# Altium PCB MTCH9010_Evaluation_Kit.PcbDoc (part 1 of 2)
Units mm, origin at the board's own origin, x right, y up, seen from the top; angles counter-clockwise.
Board outline 60 x 70 mm, 4 copper layers (Top Layer, Gnd Plane 1, Gnd Plane 2, Bottom Layer), stack 1.574 mm thick; 87 components, 67 nets, 337 pads, 182 vias.
Unrouted connection lines stored in the file: 1.
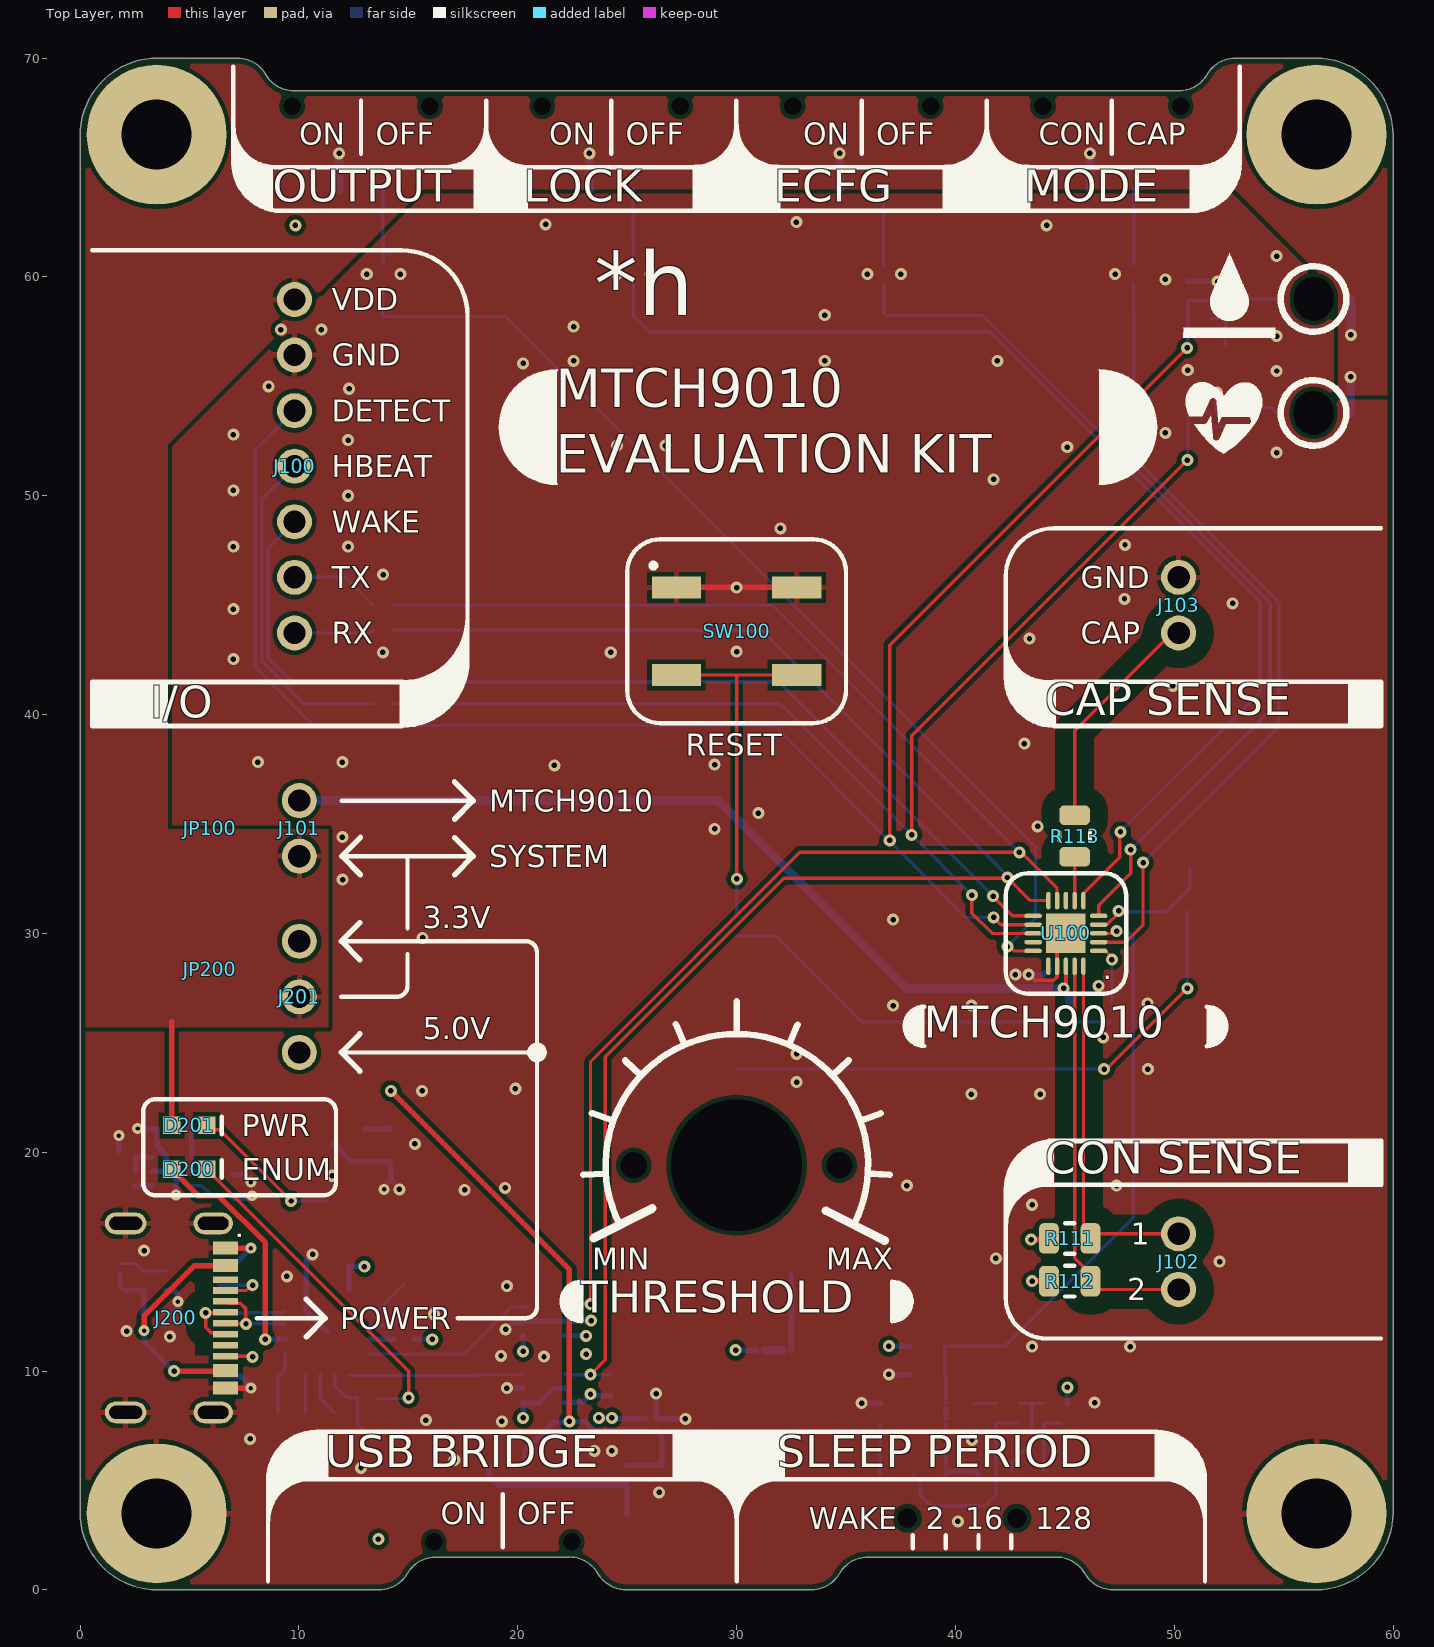
[diagram p0: Top Layer view]
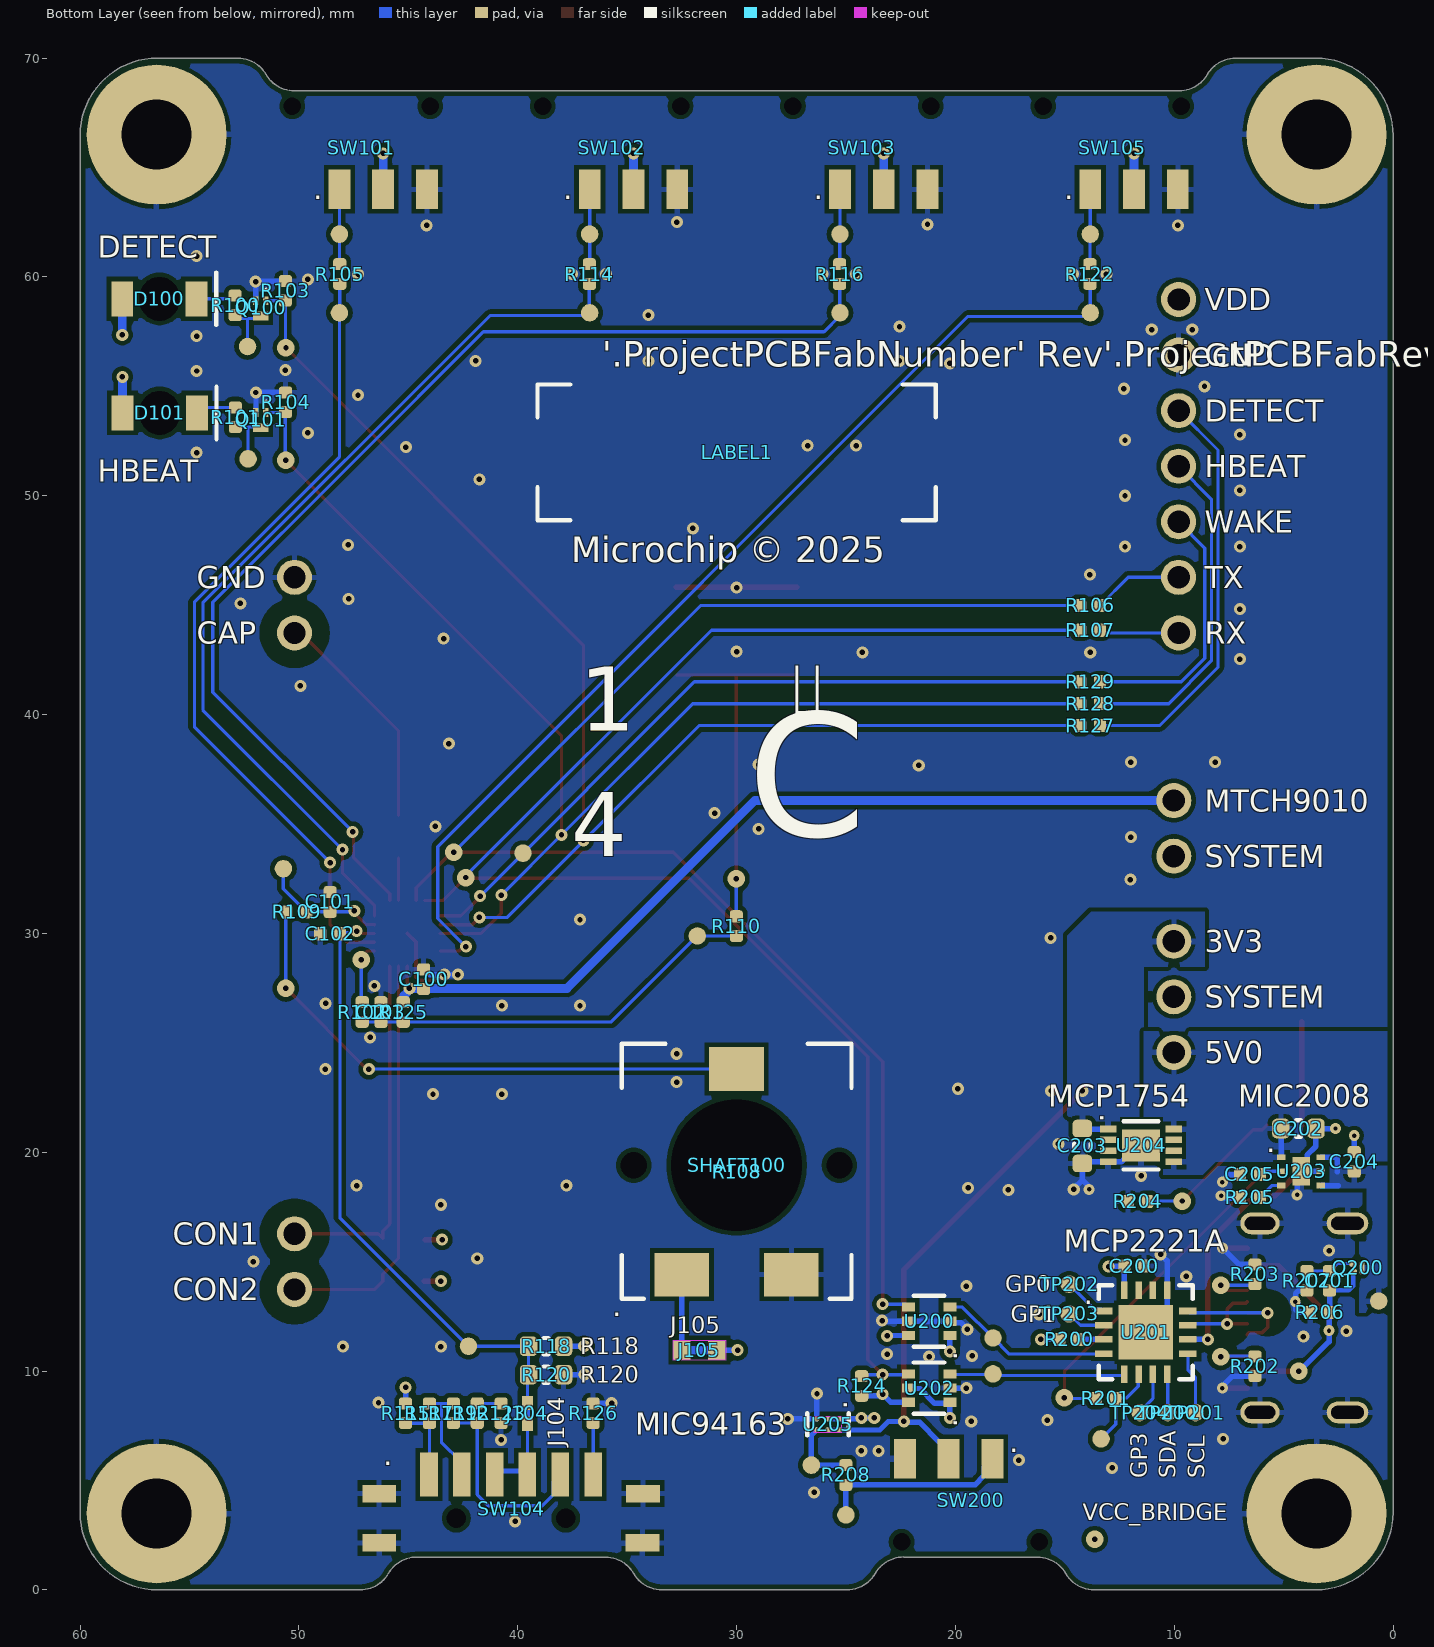
[diagram p1: Bottom Layer view, seen from below]
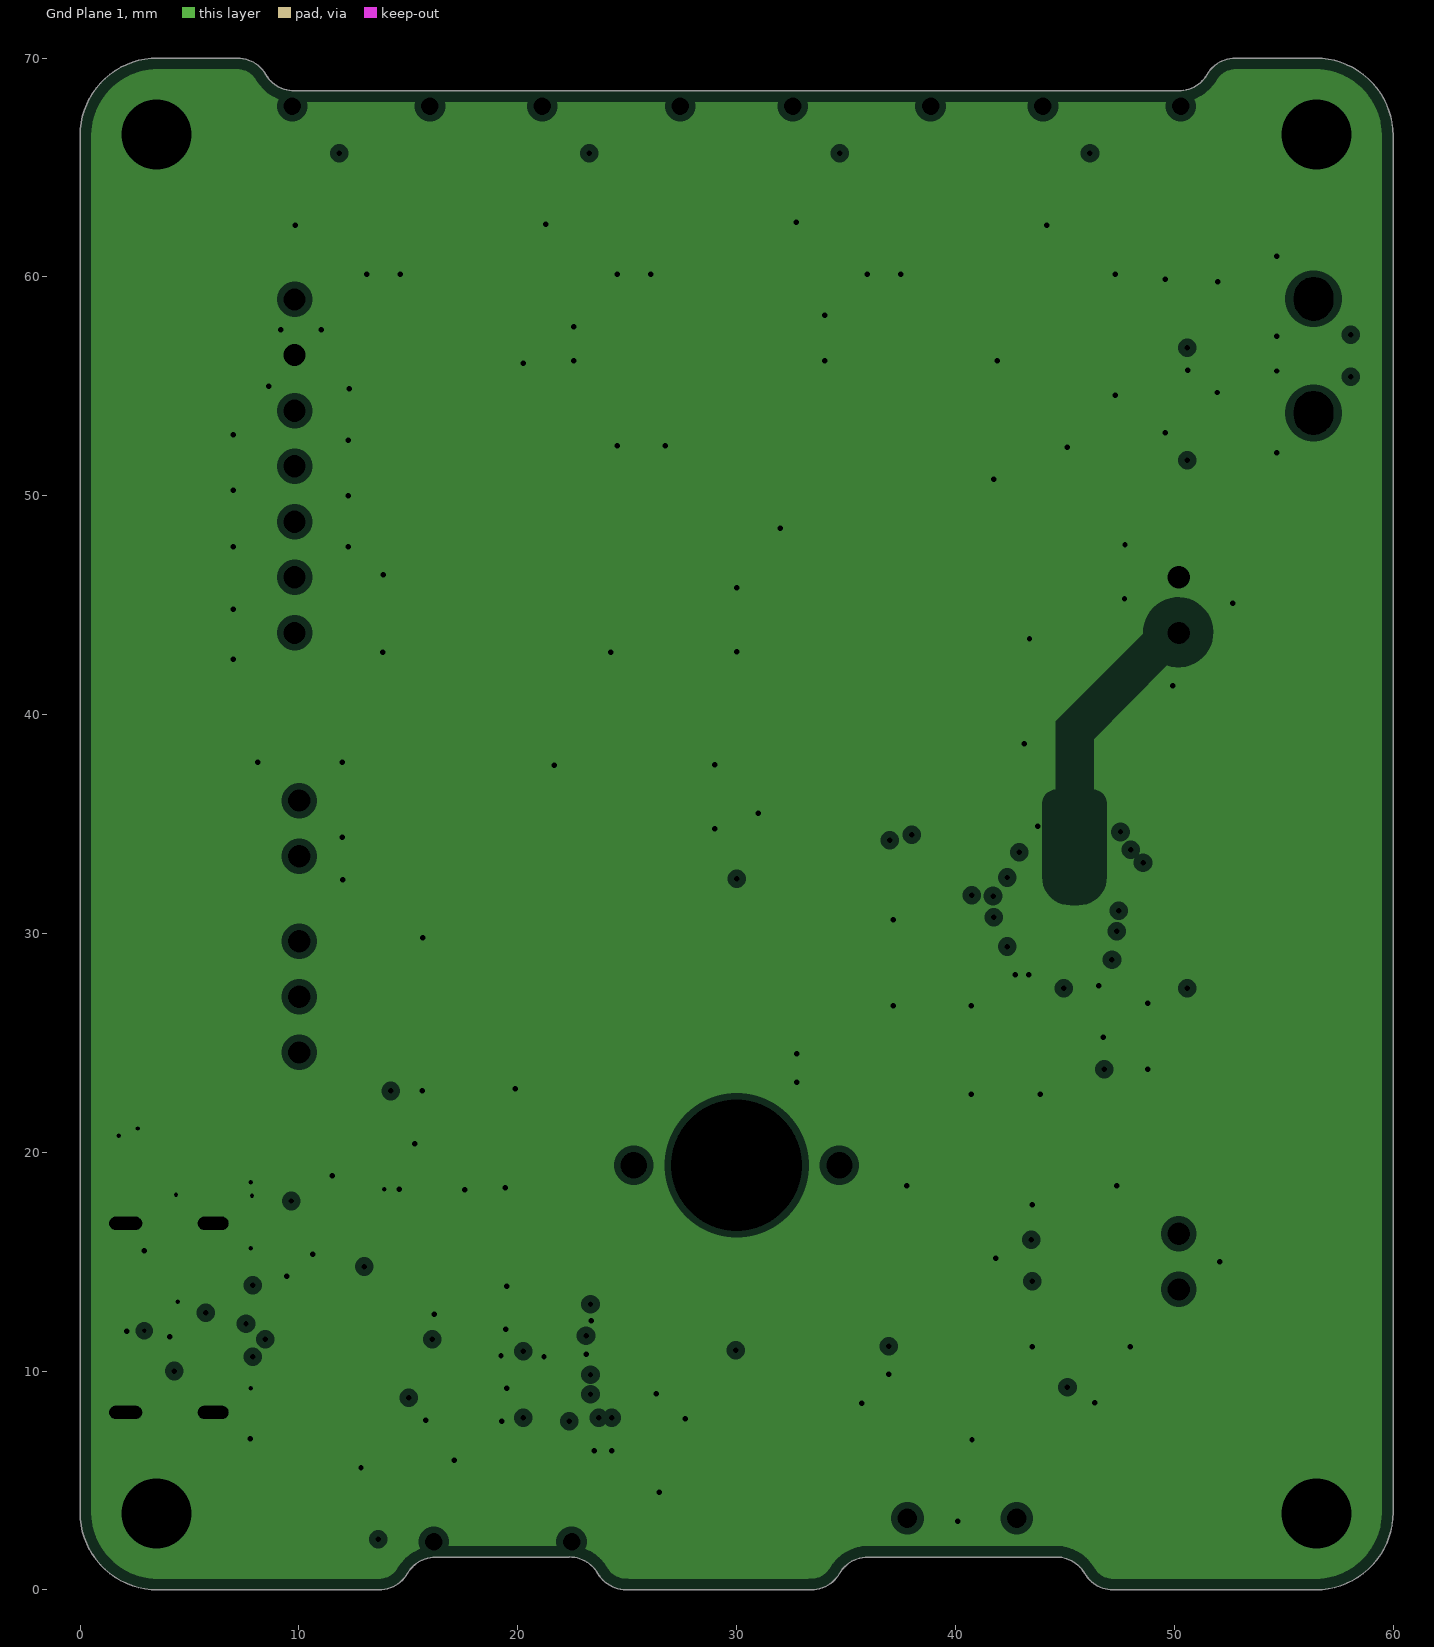
[diagram p2: Gnd Plane 1, clearances drawn from the general rule]
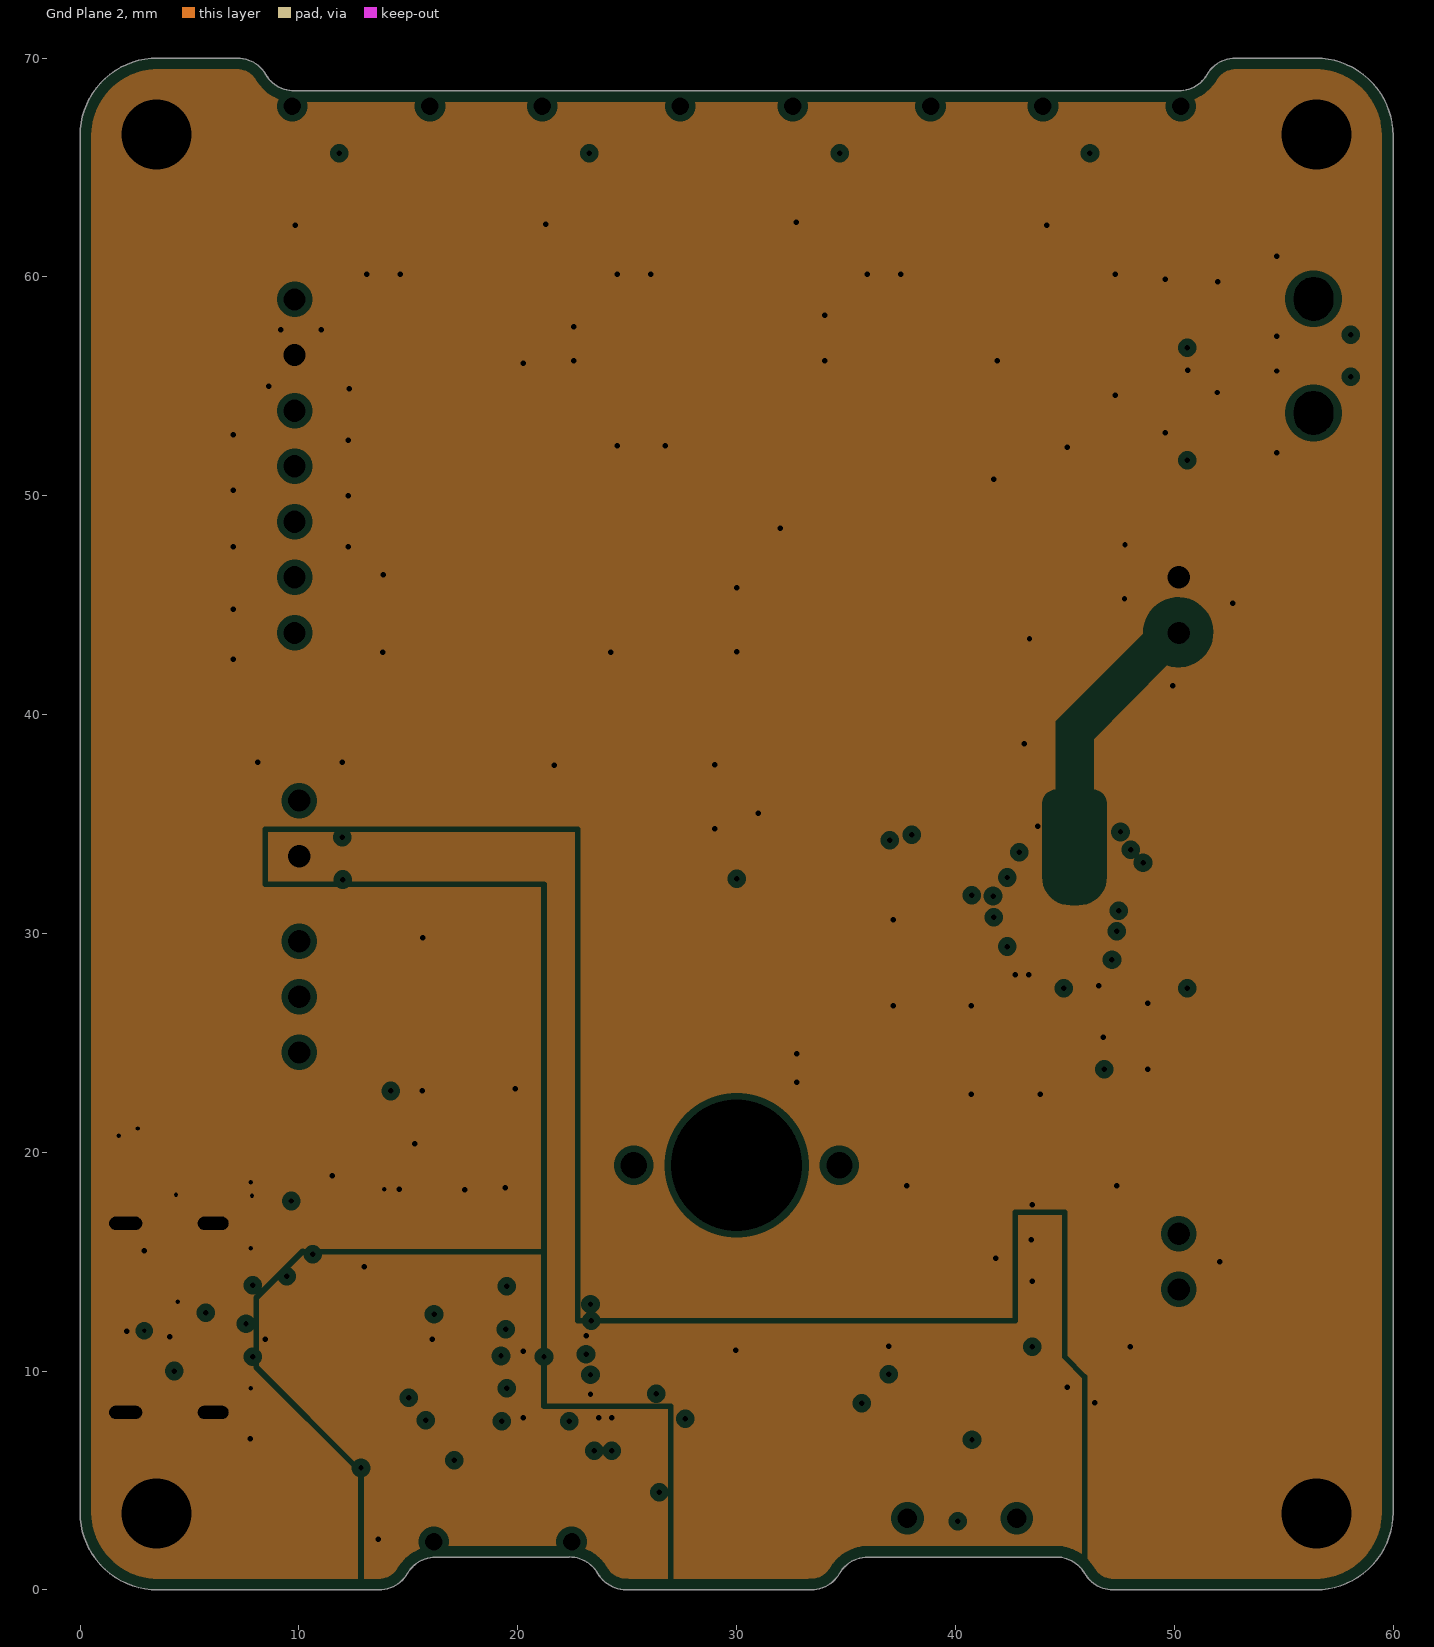
[diagram p3: Gnd Plane 2, clearances drawn from the general rule]

## Layer stack, top to bottom
Top Solder: solder mask 0.01, Solder Resist, Dk 3.5
Top Layer: signal copper 0.035
Dielectric 1: prepreg 0.1168, PP-016, Dk 4.4
Gnd Plane 1: plane copper 0.035, net GND
Dielectric2: core 1.2, FR-4, Dk 4.2
Gnd Plane 2: plane copper 0.035, net (Multiple Nets)
Dielectric 3: prepreg 0.1168, PP-016, Dk 4.4
Bottom Layer: signal copper 0.035
Bottom Solder: solder mask 0.01, Solder Resist, Dk 3.5

## Board outline
3.54,0 13.66,-0.001 13.66,0 ccw(c13.66,1.5) 14.959,0.75 cw(c16.258,0) 16.258,1.5 16.246,1.5 22.358,1.5 22.36,1.504 cw(c22.36,0.004) 23.659,0.754 ccw(c24.958,1.504) 24.958,0.004 24.956,0 33.4,0 33.406,0 ccw(c33.406,1.5) 34.705,0.75 cw(c36.004,0) 36.004,1.5 36.006,1.5 44.608,1.5 44.609,1.5 cw(c44.609,0) 45.908,0.75 ccw(c47.207,1.5) 47.207,0 56.46,0 ccw(c56.46,3.54) 60,3.54 60,66.46 ccw(c56.46,66.46) 56.46,70 52.799,70 ccw(c52.799,68.5) 51.5,69.25 cw(c50.201,70) 50.201,68.5 50.2,68.5 9.787,68.5 9.786,68.5 cw(c9.786,70) 8.487,69.25 ccw(c7.188,68.5) 7.188,70 3.54,70 ccw(c3.54,66.46) 0,66.46 0,66.51 0,3.54 ccw(c3.54,3.54)

## Design rules (kind name [scope] priority, off if disabled: settings)
AcuteAngle [All] p1: minimum=7.50000000000000E+0001 checktracksonly=FALSE
AssemblyTestPointUsage AssemblyTestPointUsage_Prohibited [InNetClass('NO TESTPOINT')] p1: valid=1
AssemblyTestPointUsage [All] p2: allowmultiple=TRUE
AssemblyTestpoint AssemblyTestpoint_TP_Component [HasFootprint('CON_TP_0.8dia_SMD_with_Test_Jig_Layer') Or HasFootprint('CON_JMPR_0603_PCB_TRACE_LINK_N')] p1: testpointundercomponent=TRUE minsize=0.8 maxsize=2.54 preferedsize=0.8 minholesize=0 maxholesize=1.27 preferedholesize=0.25 testpointgrid=0.025 usegrid=FALSE gridtolerance=0 allowsidetop=TRUE allowsidebottom=TRUE minspacing=1.27
AssemblyTestpoint [All] p2: testpointundercomponent=FALSE minsize=0.8 maxsize=2.54 preferedsize=0.8 minholesize=0 maxholesize=1.27 preferedholesize=0.25 testpointgrid=0.025 usegrid=FALSE gridtolerance=0 allowsidebottom=TRUE minspacing=1.27 compbodyclearance=1.27
BoardOutlineClearance BoardOutlineClearance_LAYERNAME [IsText and (X1 >= 100) and (Y1 <= -60)] p1: gap=0 ignorepadtopadclearanceinfootprint=FALSE
BoardOutlineClearance [All] p2: gap=0.25 ignorepadtopadclearanceinfootprint=FALSE
Clearance Clearance_Small_FET [HasFootprint('LGA-3_GSD_0.7x0.6_CSD25501F3')] p1: gap=0.15 ignorepadtopadclearanceinfootprint=FALSE except(0.1: SMDPad-SMDPad; 0.3: Arc-Hole Track-Hole SMDPad-Hole THPad-Hole Via-Hole Fill-Hole Poly-Hole Region-Hole Text-Hole)
Clearance Clearance_Poly_Impedance [IsRegion AND InNet('GND') vs InDifferentialPairClass('All Differential Pairs') OR InNetClass('SENSE')] p2: gap=0.8 ignorepadtopadclearanceinfootprint=FALSE
Clearance Clearance_Poly [InPoly] p3: gap=0.2 ignorepadtopadclearanceinfootprint=FALSE
Clearance [All] p4: gap=0.15 ignorepadtopadclearanceinfootprint=FALSE except(0.3: Arc-Hole Track-Hole SMDPad-Hole THPad-Hole Via-Hole Fill-Hole Poly-Hole Region-Hole Text-Hole)
ComponentClearance ComponentClearance_Jumper [HasFootprint('Jumper_Mechanical')] p1: gap=0 collisioncheckmode=3 verticalgap=0 showdistances=FALSE
ComponentClearance [All] p2: gap=0.254 collisioncheckmode=3 verticalgap=0.254 showdistances=TRUE donotcheckwithout3dbody=TRUE
DiffPairsRouting [All] p1: maxlimit=0.22 minlimit=0.22 mostfreqgap=0.22 toplayer_minwidth=0.16 toplayer_maxwidth=0.16 toplayer_prefwidth=0.16 bottomlayer_minwidth=0.16 bottomlayer_maxwidth=0.16 bottomlayer_prefwidth=0.16 maxuncoupledlength=7
FabricationTestPointUsage TestPointUsage [All] p1 off: valid=2 allowmultiple=TRUE
FabricationTestpoint Testpoint [All] p1 off: side=2 testpointundercomponent=TRUE minsize=0.8 maxsize=2.54 preferedsize=0.8 minholesize=0 maxholesize=1.27 preferedholesize=0.25 testpointgrid=0 allowsidebottom=TRUE usegrid=FALSE gridtolerance=0 minspacing=1.27
HoleSize [All] p1: absolutevalues=TRUE maxlimit=6.2 minlimit=0.2 maxpercent=80.000 minpercent=20.000
HoleToHoleClearance [All] p1: gap=0.3 allowstackedmicrovias=FALSE
MinimumAnnularRing [All] p1: minimumring=0.15
MinimumSolderMaskSliver LevelShifters [HasCompParameterValue('MCHP-ID','IC1665')] p1: minsoldermaskwidth=0.075
MinimumSolderMaskSliver [All] p2: minsoldermaskwidth=0.08
NetAntennae [Not IsTestpoint] p1: netantennaetolerance=0
PlaneClearance [All] p1: clearance=0.3
PlaneConnect [All] p1: pad.planeconnectstyle=Relief pad.reliefexpansion=0.25 pad.reliefentries=4 pad.reliefconductorwidth=0.25 pad.reliefairgap=0.25 via.planeconnectstyle=Direct via.reliefexpansion=0.508 via.reliefentries=4 via.reliefconductorwidth=0.254 via.reliefairgap=0.254
PolygonConnect [All] p1: thpad.connectstyle=Relief thpad.reliefconductorwidth=0.254 thpad.reliefentries=4 thpad.polygonreliefangle="90 Angle" thpad.airgapwidth=0.2 smdpad.connectstyle=Relief smdpad.reliefconductorwidth=0.254 smdpad.reliefentries=4 smdpad.polygonreliefangle="90 Angle" smdpad.airgapwidth=0.2 via.connectstyle=Direct via.reliefconductorwidth=0.254 via.reliefentries=4 via.polygonreliefangle="90 Angle" via.airgapwidth=0.2
RoutingVias [All] p1: holewidth=0.25 width=0.55 viastyle="Through Hole" minholewidth=0.2 minwidth=0.5 maxholewidth=0.5 maxwidth=1
SMDNeckDown [All] p1: percent=98.000
SilkToSilkClearance SilkToSilkClearance_Text [IsText] p1: silktosilkclearance=0
SilkToSilkClearance [All] p2: silktosilkclearance=0.1
SilkToSolderMaskClearance SilkscreenOverComponentPads_Soldermask [All] p1: minsilkscreentomaskgap=0.12 clearancetoexposedcopper=FALSE
SilkToSolderMaskClearance SilkscreenOverComponentPads_Copper [All] p2: minsilkscreentomaskgap=0.2 clearancetoexposedcopper=TRUE
SolderMaskExpansion SolderMaskTenting [IsVia AND NOT (IsFabTestpoint OR IsAssyTestpoint)] p1: expansion=-1 istentingtop=FALSE
SolderMaskExpansion [All] p2: expansion=0.06 istentingtop=FALSE
SupplyNets "Schematic Supply Nets_1" [InNet('VCC_BRIDGE')] p1: voltage=0.000
SupplyNets "Schematic Supply Nets_12" [InNet('VCC_P5V0')] p2: voltage=0.000
SupplyNets "Schematic Supply Nets_11" [InNet('VCC_MTCH9010')] p3: voltage=0.000
SupplyNets "Schematic Supply Nets_10" [InNet('VCC_SYSTEM')] p4: voltage=0.000
SupplyNets "Schematic Supply Nets_8" [InNet('VBUS')] p5: voltage=0.000
SupplyNets "Schematic Supply Nets_6" [InNet('GND')] p6: voltage=0.000
SupplyNets "Schematic Supply Nets_4" [InNet('VCC_P3V3')] p7: voltage=0.000
SupplyNets "Schematic Supply Nets" [InNet('VBUS_DELAYED')] p8: voltage=0.000
UnRoutedNet [All] p1: checkbadconnections=TRUE
ViasUnderSMD ViasUnderSMD_Testpoint [HasPad('TP202-1') OR HasPad('U200-7')] p1: allowed=TRUE
ViasUnderSMD [All] p2: allowed=FALSE
Width Power_Width [(InNet('VCC_MTCH9010') AND InNet('VBUS_DELAYED') AND InNet('VBUS') AND InNet('VCC_P3V3') AND InNet('VCC_P5V0') AND InNet('VCC_SYSTEM'))] p1: maxlimit=0.254 minlimit=0.2 preferedwidth=0.25 minimp=50.000000 maximp=50.000000 favimp=50.000000
Width [All] p2: maxlimit=10 minlimit=0.125 preferedwidth=0.15 minimp=50.000000 maximp=50.000000 favimp=50.000000
15 further rules are at their usual default settings.

## Classes and differential pairs
net class "NO TESTPOINT": CAP_INPUT NetC201_1 NetC205_2 NetJ104_2 NetR121_1 NetR126_1 NetR200_1 NetR205_2 SENSE_CAP SENSE_CON1 SENSE_CON2 SLEEP_2S SLEEP_16S SLEEP_128S USB_N USB_P
net class SENSE: CAP_INPUT SENSE_CAP SENSE_CON1 SENSE_CON2
component class MTCH9010_Evaluation_Kit_TopLevel: LABEL1 Test1
component class S2: C100 C101 C102 C103 D100 D101 J100 J101 J102 J103 J104 J105 JP100 mx Q100 Q101 R100 R101 R102 R103 R104 R105 R106 R107 R108 R109 R110 R111 R112 R113 R114 R115 R116 R117 R118 R119 R120 R121 R122 R123 R124 R125 R126 R127 R128 R129 SHAFT100 SW100 SW101 SW102 SW103 SW104 SW105 U100
component class S1: C200 C201 C202 C203 C204 C205 D200 D201 J200 J201 JP200 Q200 R200 R201 R202 R203 R204 R205 R206 R207 R208 SW200 TP200 TP201 TP202 TP203 TP204 U200 U201 U202 U203 U204 U205
differential pair USB: +USB_P -USB_N

## Components (designator, comment, footprint, x,y, rotation, side; value= is the part's Value field where it differs from the comment)
C100 "Capacitor NP" CAP_C_0402 44.3,27.91 r90 bottom locked value=0.1uF
C101 "Capacitor NP" CAP_C_0402 48.575,31.435 r270 bottom locked value=1000pF
C102 "Capacitor NP" CAP_C_0402 48.575,29.985 r180 bottom locked value=1000pF
C103 "Capacitor NP" CAP_C_0402 46.25,26.405 r90 bottom locked value=10nF
C200 "Capacitor NP" CAP_C_0402 11.825,14.795 r180 bottom locked value=0.1uF
C201 "Capacitor NP" CAP_C_0402 2.9,14.125 r270 bottom locked value=0.1uF
C202 "Capacitor NP" CAP_C_0603 4.326,21.082 r0 bottom locked value=4.7uF
C203 "Capacitor NP" CAP_C_0603 14.2,20.286 r90 bottom locked value=4.7uF
C204 "Capacitor NP" CAP_C_0402 1.773,19.559 r270 bottom locked value=2.2uF
C205 "Capacitor NP" CAP_C_0402 6.54,18.982 r180 bottom locked value=2200pF
D100 "LED_yellow" LED_DIA_597-6xxx_1206_RM 56.373,59 r180 top locked value=YELLOW
D101 "LED_yellow" LED_DIA_597-6xxx_1206_RM 56.366,53.788 r180 top locked value=YELLOW
D200 "LED_green" LED_0603_Green 4.978,19.226 r0 top locked value=GREEN
D201 "LED_green" LED_0603_Green 4.978,21.226 r0 top locked value=GREEN
J100 "Header 1x7" HDR_F_2.54_1x7_TH-PIP_RA_WCON_2185-107RSNCYNR1 9.8,51.35 r90 top locked value="HDR-2.54 Female 1x7"
J101 "Header 1x2" HDR_M_2.54_1X2_U_TH-PIP_RA_WCON_1125-1102S0R140CR01 7.247,34.8 r270 top locked value="HDR-2.54 Male 1x2"
J102 "Header 1x2" HDR_F_2.54_1x2_TH-PIP_RA_WCON_2185-102RSNCYNR1 50.2,15 r270 top locked value="HDR-2.54 Female 1x2"
J103 "Header 1x2" HDR_F_2.54_1x2_TH-PIP_RA_WCON_2185-102RSNCYNR1 50.2,45 r270 top locked value="HDR-2.54 Female 1x2"
J104 "CON JMPR LINK CLOSED" CON_JMPR_0402_PCB_TRACE_LINK 39.558,8.071 r270 bottom locked net-tie value="CON 0402 PCB TRACE LINK"
J105 "CON JMPR LINK CLOSED" CON_JMPR_0603_PCB_TRACE_LINK_N 31.7,10.954 r180 bottom locked net-tie value="CON 0603 PCB TRACE LINK"
J200 "CON USB2.0-C RCPT SMD RA KLS KLS1-5409" CON_USB2.0-C_RCPT_SMD_RA_KLS_KLS1-5409 3.437,12.43 r270 top locked value="USB2.0 Type-C FEMALE"
J201 "Header 1x3" HDR_M_2.54_1X2_U_TH-PIP_RA_WCON_1125-1103S0R140CR01 7.247,27.1 r270 top locked value="HDR-2.54 Male 1x3"
JP100 "Jumper Mechanical" Jumper_Mechanical 5.924,34.8 r90 top value="JUMPER 2.54mm 1x2"
JP200 "Jumper Mechanical" Jumper_Mechanical 5.924,28.353 r90 top value="JUMPER 2.54mm 1x2"
LABEL1 "08-10015" 08-10015 30,51.985 r180 bottom locked value="PCBA LABEL 18X6mm"
Q100 "Transistor MOS-N GSD" X1-DFN1006-3 51.746,58.567 r270 bottom locked value=DMN65D8LFB-7B
Q101 "Transistor MOS-N GSD" X1-DFN1006-3 51.739,53.454 r270 bottom locked value=DMN65D8LFB-7B
Q200 "Transistor MOS-P GSD" LGA-3_GSD_0.7x0.6_CSD25501F3 1.646,14.712 r180 bottom locked value=CSD25501F3
R100 "Resistor" RES_C_0402 52.913,58.7 r90 bottom locked value=2.2k
R101 "Resistor" RES_C_0402 52.906,53.588 r90 bottom locked value=2.2k
R102 "Resistor" RES_C_0402 47.106,26.405 r270 bottom locked value=470R
R103 "Resistor" RES_C_0402 50.618,59.367 r270 bottom locked value=300k
R104 "Resistor" RES_C_0402 50.611,54.272 r270 bottom locked value=300k
R105 "Resistor" RES_C_0402 48.135,60.132 r90 bottom locked value=1k
R106 "Resistor" RES_C_0402 13.842,44.985 r0 bottom locked value=1k
R107 "Resistor" RES_C_0402 13.842,43.854 r0 bottom locked value=1k
R108 "Resistor Var" RES_VAR_PIHER_PS-10V60_L10.9W10.3H5.7 30,19.403 r180 bottom locked value=100k
R109 "Resistor" RES_C_0402 50.11,30.985 r0 bottom locked value=1k
R110 "Resistor" RES_C_0402 30.01,30.333 r90 bottom locked value=470R
R111 "Resistor" RES_C_0805 45.225,16.061 r180 top locked value=10k
R112 "Resistor" RES_C_0805 45.225,14.107 r180 top locked value=10k
R113 "Resistor" RES_C_0805 45.45,34.45 r90 top locked value=10k
R114 "Resistor" RES_C_0402 36.727,60.132 r90 bottom locked value=1k
R115 "Resistor" RES_C_0402 45.129,8.071 r90 bottom locked value=100k
R116 "Resistor" RES_C_0402 25.29,60.132 r90 bottom locked value=1k
R117 "Resistor" RES_C_0402 44.036,8.071 r90 bottom locked value=300k
R118 "Resistor" RES_C_0603 38.708,11.134 r180 bottom locked value=0R
R119 "Resistor" RES_C_0402 42.943,8.071 r270 bottom locked value=300k
R120 "Resistor" RES_C_0603 38.708,9.834 r0 bottom locked value=0R
R121 "Resistor" RES_C_0402 41.85,8.074 r270 bottom locked value=100k
R122 "Resistor" RES_C_0402 13.852,60.132 r90 bottom locked value=1k
R123 "Resistor" RES_C_0402 40.758,8.071 r90 bottom locked value=100k
R124 "Resistor" RES_C_0402 24.282,9.32 r270 bottom locked value=47k
R125 "Resistor" RES_C_0402 45.231,26.405 r90 bottom locked value=10k
R126 "Resistor" RES_C_0402 36.556,8.071 r90 bottom locked value=1k
R127 "Resistor" RES_C_0402 13.841,39.5 r0 bottom locked value=1k
R128 "Resistor" RES_C_0402 13.842,40.5 r0 bottom locked value=1k
R129 "Resistor" RES_C_0402 13.842,41.5 r0 bottom locked value=1k
R200 "Resistor" RES_C_0402 14.8,11.445 r0 bottom locked value=1k
R201 "Resistor" RES_C_0402 13.125,8.75 r180 bottom locked value=1k
R202 "Resistor" RES_C_0402 6.311,10.22 r270 bottom locked value=5.1k
R203 "Resistor" RES_C_0402 6.311,14.42 r90 bottom locked value=5.1k
R204 "Resistor" RES_C_0402 11.667,17.75 r180 bottom locked value=1k
R205 "Resistor" RES_C_0402 6.54,17.933 r180 bottom locked value=470R
R206 "Resistor" RES_C_0402 3.35,12.683 r0 bottom locked value=47k
R207 "Resistor" RES_C_0402 3.937,14.125 r270 bottom locked value=47k
R208 "Resistor" RES_C_0402 25.004,5.25 r90 bottom locked value=47k
SHAFT100 "PT10_SHAFT" PT10_Shaft_Mechanical 30,19.403 r180 bottom locked value="MISC PT10-SHAFT"
SW100 "Switch 4 Pin" SW_TACT_SMD_DW_TS604VM1-035CR-R 30,43.809 r0 top locked value="TACT SPST"
SW101 "SWITCH SLIDE SMD SPDT SLW-88229-2-SMT-TR" SW_SLIDE_SMD_SS_SLW-88229-2-SMT-TR 47.15,66.25 r180 bottom locked value="SLIDE SPDT"
SW102 "SWITCH SLIDE SMD SPDT SLW-88229-2-SMT-TR" SW_SLIDE_SMD_SS_SLW-88229-2-SMT-TR 35.712,66.25 r180 bottom locked value="SLIDE SPDT"
SW103 "SWITCH SLIDE SMD SPDT SLW-88229-2-SMT-TR" SW_SLIDE_SMD_SS_SLW-88229-2-SMT-TR 24.275,66.25 r180 bottom locked value="SLIDE SPDT"
SW104 "SWITCH SLIDE SMD SP4T" SW_SLIDE_SMD_RA_SP4T_L-KLS7-MSS-1400SD-BR 40.306,3.276 r0 bottom locked value="SLIDE SP4T"
SW105 "SWITCH SLIDE SMD SPDT SLW-88229-2-SMT-TR" SW_SLIDE_SMD_SS_SLW-88229-2-SMT-TR 12.837,66.25 r180 bottom locked value="SLIDE SPDT"
SW200 "SWITCH SLIDE SMD SPDT SLW-88229-2-SMT-TR" SW_SLIDE_SMD_SS_SLW-88229-2-SMT-TR 19.309,3.743 r0 bottom locked value="SLIDE SPDT"
TP200 "Test Point No BOM" CON_TP_0.8dia_SMD_with_Test_Jig_Layer 10.3,8.1 r90 bottom locked value="TP SMD D0.8"
TP201 "Test Point No BOM" CON_TP_0.8dia_SMD_with_Test_Jig_Layer 9.03,8.1 r90 bottom locked value="TP SMD D0.8"
TP202 "Test Point No BOM" CON_TP_0.8dia_SMD_with_Test_Jig_Layer 14.8,13.97 r90 bottom locked value="TP SMD D0.8"
TP203 "Test Point No BOM" CON_TP_0.8dia_SMD_with_Test_Jig_Layer 14.8,12.612 r90 bottom locked value="TP SMD D0.8"
TP204 "Test Point No BOM" CON_TP_0.8dia_SMD_with_Test_Jig_Layer 11.57,8.1 r90 bottom locked value="TP SMD D0.8"
U100 "MTCH9010-VQFN20" VQFN-20_3X3_EP1.8x1.8_NO_VIAS 45.05,30 r180 top locked value=MTCH9010
U200 "74LVC(H)1T45 SOT-23-6_SC-70-6_SOT-6_SOT-363_DSBGA" SOT-363 21.2,12.275 r0 bottom locked value=74LVC1T45DW-7
U201 "MCP2221 QFN-16" QFN-16_4X4_EP2.5X2.5 11.3,11.77 r180 bottom locked value=MCP2221A
U202 "74LVC(H)1T45 SOT-23-6_SC-70-6_SOT-6_SOT-363_DSBGA" SOT-363 21.2,9.22 r0 bottom locked value=74LVC1T45DW-7
U203 "MIC2008YML-TR VDFN-6" VDFN-6_2x2_EP0.8X1.40 4.204,19.126 r180 bottom locked value=MIC2008
U204 "MCP1755 DFN-8" DFN-8_2x3 11.517,20.311 r270 bottom locked value=MCP1754/3.3V
U205 "MIC94163_1.5MM_1MM" MIC94163_1.5MM_1MM 25.825,7.564 r270 bottom locked value=MIC94163YCS

## Footprints (in the part's own frame and the unit in brackets; to place one, negate y for a bottom-side part, rotate by r counter-clockwise, add the part's x,y. Pads: shape width x height; smd on the part's side, far side on the other; paste and mask are expansions set on the pad)
08-10015 [mm]
  silkscreen extent -9.1,-3.1 9.1,3.1, body extent -9,-3 9,3, height 0.1
CAP_C_0402 [mm] "Chip Capacitor, 2-Leads, Body 1.0x0.5mm, IPC High Density"
  rrect50% 0.55x0.6 smd: 1(-0.45,0) 2(0.45,0)
  body extent -0.5,-0.3 0.5,0.3, height 0.2
CAP_C_0603 [mm] "Chip Capacitor, 2-Leads, Body 1.6x0.8mm, IPC Medium Density"
  rrect50% 0.8x0.9 smd: 1(-0.8,0) 2(0.8,0)
  silkscreen extent -0.1,-0.38 0.1,0.38, body extent -0.8,-0.4 0.8,0.4, height 0.85
CON_JMPR_0402_PCB_TRACE_LINK [mm]
  rect 0.65x0.5 smd paste-1: 1(-0.475,0) 2(0.475,0)
  Top Layer lines w0.254: 0.2,0 -0.175,0
CON_JMPR_0603_PCB_TRACE_LINK_N [mm]
  rect 0.8x0.9 smd paste-2539.97: 1(-0.8,0) 2(0.8,0)
  Top Layer lines w0.4: 0.4,0 -0.4,0
CON_TP_0.8dia_SMD_with_Test_Jig_Layer [mil]
  round 31.5 smd paste-39.37: 1(0,0)
CON_USB2.0-C_RCPT_SMD_RA_KLS_KLS1-5409 [mm]
  rrect50% 1x1.8 on Top Paste: 0(-4.32,2.645) 0(4.32,2.645)
  rrect50% 1x1.9 on Top Paste: 0(-4.32,-1.355) 0(4.32,-1.355)
  oval 1x1.8 hole 0.6 slot 1.4 at 90 deg: 1(-4.32,2.645) 2(4.32,2.645)
  oval 1x1.9 hole 0.6 slot 1.5 at 90 deg: 3(-4.32,-1.355) 4(4.32,-1.355)
  rect 0.6x1.15 smd: A1/B12(-3.2,3.21) A4/B9(-2.4,3.21) B1/A12(3.2,3.21) B4/A9(2.4,3.21)
  rect 0.3x1.15 smd: A5(-1.25,3.21) A6(-0.25,3.21) A7(0.25,3.21) A8(1.25,3.21) B5(1.75,3.21) B6(0.75,3.21) B7(-0.75,3.21) B8(-1.75,3.21)
  body extent -4.47,-3.46 4.47,3.45, height 3.26
DFN-8_2x3 [mm] "DFN, 8-Leads, Body 3.0x2.0mm (max), Pitch 0.5"
  rect 0.3x0.75 smd mask+0.05: 1(-0.75,-1.5) 2(-0.25,-1.5) 3(0.25,-1.5) 4(0.75,-1.5) 5(0.75,1.5) 6(0.25,1.5) 7(-0.25,1.5) 8(-0.75,1.5)
  rect 1.45x1.75 smd mask+0.075: 9(0,0)
  silkscreen extent -1.1,-0.8 1.1,0.8, body extent -1,-1.5 1,1.5, height 1
HDR_F_2.54_1x2_TH-PIP_RA_WCON_2185-102RSNCYNR1 [mm]
  rect 1.75x1.75 on Top Paste: 0(-1.27,0) 0(1.27,0)
  round 1.6 hole 1.02: 1(-1.27,0) 2(1.27,0)
  body extent -2.79,-0.2 2.79,10.03, height 2.43
HDR_F_2.54_1x7_TH-PIP_RA_WCON_2185-107RSNCYNR1 [mm]
  rect 1.75x1.75 on Top Paste: 0(-7.62,0) 0(-5.08,0) 0(-2.54,0) 0(0,0) 0(2.54,0) 0(5.08,0) 0(7.62,0)
  round 1.6 hole 1.02: 1(-7.62,0) 2(-5.08,0) 3(-2.54,0) 4(0,0) 5(2.54,0) 6(5.08,0) 7(7.62,0)
  body extent -9.14,-0.2 9.14,10.03, height 2.43
HDR_M_2.54_1X2_U_TH-PIP_RA_WCON_1125-1102S0R140CR01 [mm]
  rect 1.75x1.75 on Top Paste: 0(-1.27,2.77) 0(1.27,2.77)
  round 1.6 hole 1.02: 1(-1.27,2.77) 2(1.27,2.77)
  body extent -2.54,-7.22 2.54,3.1, height 2.55
HDR_M_2.54_1X2_U_TH-PIP_RA_WCON_1125-1103S0R140CR01 [mm]
  rect 1.75x1.75 on Top Paste: 0(-2.54,2.77) 0(0,2.77) 0(2.54,2.77)
  round 1.6 hole 1.02: 1(-2.54,2.77) 2(0,2.77) 3(2.54,2.77)
  body extent -3.81,-7.22 3.81,3.1, height 2.55
Jumper_Mechanical [mm]
  body extent -2.49,0 2.49,5.97, height 2.49
LED_0603_Green [mm] "LED chip 0603"
  rect 0.8x0.8 smd: 1(-0.8,0) 2(0.8,0)
  silkscreen extent 1.5,-0.4 1.5,0.4, body extent -0.81,-0.4 0.81,0.4, height 0.6
LED_DIA_597-6xxx_1206_RM [mm] "LED Dialight  597-6xxx 1206 Reverse Mount"
  round 0 hole 1.8 slot 2 at 90 deg unplated mask+0.05: 0(0,0)
  rect 1x1.6 smd far side mask+0.05: 1(-1.7,0)
  rect 1x1.6 smd far side paste+0 mask+0.05: 2(1.7,0)
  body extent -1.6,-0.8 1.6,0.8, height 0.3
LGA-3_GSD_0.7x0.6_CSD25501F3 [mm]
  rrect50% 0.25x0.2 on Bottom Paste: 0(-0.175,-0.2) 0(-0.175,0.2)
  rrect80% 0.35x0.25 smd paste-2539.97 mask-0.05: 1(-0.175,0.175) 2(-0.175,-0.175)
  rrect80% 0.25x0.6 smd paste-0.05 mask-0.05: 3(0.225,0)
  body extent -0.37,-0.32 0.37,0.32, height 0.22
MIC94163_1.5MM_1MM [mm] "6-ball, Body 1.5x1.0mm), Pitch 0.35"
  round 0.25 smd mask+0.05: A1(-0.254,0.508) A2(0.254,0.508) B1(-0.254,0) B2(0.254,0) C1(-0.254,-0.508) C2(0.254,-0.508)
  silkscreen extent -0.51,-0.95 0.51,0.95, body extent -0.53,-0.75 0.47,0.75, height 0.8
PT10_Shaft_Mechanical [mm]
  body extent -2.5,-2.5 2.5,2.5, height 0.84
QFN-16_4X4_EP2.5X2.5 [mm]
  rect 0.8x0.3 smd mask+0.075: 1(-1.925,0.975) 2(-1.925,0.325) 3(-1.925,-0.325) 4(-1.925,-0.975) 9(1.925,-0.975) 10(1.925,-0.325) 11(1.925,0.325) 12(1.925,0.975)
  rect 0.3x0.8 smd mask+0.075: 5(-0.975,-1.925) 6(-0.325,-1.925) 7(0.325,-1.925) 8(0.975,-1.925) 13(0.975,1.925) 14(0.325,1.925) 15(-0.325,1.925) 16(-0.975,1.925)
  rect 2.5x2.5 smd paste-2539.97 mask+0.075: 17(0,0)
  silkscreen extent -2.15,-2.15 2.15,2.15, body extent -2.05,-2.05 2.05,2.05, height 0.9
RES_C_0402 [mm] "Chip Resistor, 2-Leads, Body 1.0x0.5mm, IPC Medium Density"
  rrect50% 0.55x0.6 smd: 1(-0.45,0) 2(0.45,0)
  body extent -0.5,-0.3 0.5,0.3, height 0.2
RES_C_0603 [mm] "Chip Resistor, 2-Leads, Body 1.6x0.8mm, IPC Medium Density"
  rrect50% 0.8x0.9 smd paste-2539.97: 1(-0.8,0) 2(0.8,0)
  silkscreen extent -0.1,-0.38 0.1,0.38, body extent -0.8,-0.4 0.8,0.4, height 0.3
RES_C_0805 [mm] "Chip Resistor, 2-Leads, Body 2.0x1.3mm, IPC Medium Density"
  rrect50% 0.9x1.4 smd: 1(-0.95,0) 2(0.95,0)
  silkscreen extent -0.2,-0.7 0.2,0.7, body extent -1,-0.63 1,0.63, height 0.78
RES_VAR_PIHER_PS-10V60_L10.9W10.3H5.7 [mm]
  rect 2.5x2 smd: 1(-2.5,-5) 2(0,4.4) 3(2.5,-5)
  round 0 hole 1.2 unplated mask+0.15: MH(-4.7,0) MH(4.7,0)
  round 0 hole 6 unplated mask+0.15: MH(0,0)
  silkscreen extent -5.25,-6.1 5.25,5.55, body extent -5.15,-5.75 5.14,5.15, height 5.9
SOT-363 [mm]
  rect 0.6x0.42 smd mask+0.065: 1(-0.95,0.65) 2(-0.95,0) 3(-0.95,-0.65) 4(0.95,-0.65) 5(0.95,0) 6(0.95,0.65)
  silkscreen extent -0.69,-1.17 0.69,1.17, body extent -1.1,-1 1.1,1, height 1.1
SW_SLIDE_SMD_RA_SP4T_L-KLS7-MSS-1400SD-BR [mm]
  rect 0.8x2 smd: 1(3.75,-2) 2(2.25,-2) 3(0.75,-2) 4(-0.75,-2) 5(-2.25,-2) 6(-3.75,-2)
  rect 1.55x0.8 smd: 7(-6.025,-1.125) 7(-6,1.125) 7(6.025,-1.125) 7(6.025,1.125)
  round 0 hole 0.9 unplated: MH(-2.5,0) MH(2.5,0)
  body extent -6.3,-2.3 6.3,2.85, height 1.5
SW_SLIDE_SMD_SS_SLW-88229-2-SMT-TR [mm]
  rect 1x1.8 smd: 1(-1,-2.25) 2(1,-2.25) 3(3,-2.25)
  round 0 hole 0.8 unplated mask+0.15: 6(-3.15,1.55) 7(3.15,1.55)
  body extent -4.4,-2.9 4.4,3.6, height 2
SW_TACT_SMD_DW_TS604VM1-035CR-R [mm]
  rect 2.25x1 smd: 1(-2.75,2) 2(2.75,2) 3(-2.75,-2) 4(2.75,-2)
  silkscreen extent -3.9,2.9 -3.7,3.1, body extent -3.4,-3.21 3.4,3.22, height 3.47
VDFN-6_2x2_EP0.8X1.40 [mm]
  rect 0.36x0.26 on Bottom Paste: 0(-0.88,-0.65) 0(-0.88,0) 0(-0.88,0.65) 0(0.88,-0.65) 0(0.88,0) 0(0.88,0.65)
  rect 0.6x0.4 on Bottom Paste: 0(0,0.3) 0(0,-0.3)
  rect 0.4x0.26 smd paste-1: 1(-0.9,0.65) 2(-0.9,0) 3(-0.9,-0.65) 4(0.9,-0.65) 5(0.9,0) 6(0.9,0.65)
  rect 0.8x1.3 smd paste-1: 7(0,0)
  body extent -1,-1 1,1, height 0.9
VQFN-20_3X3_EP1.8x1.8_NO_VIAS [mm]
  rect 0.7x0.7 on Top Paste: 0(-0.45,0.45) 0(-0.45,-0.45) 0(0.45,0.45) 0(0.45,-0.45)
  oval 0.8x0.2 smd mask+0.05: 1(-1.5,0.8) 2(-1.5,0.4) 3(-1.5,0) 4(-1.5,-0.4) 5(-1.5,-0.8) 11(1.5,-0.8) 12(1.5,-0.4) 13(1.5,0) 14(1.5,0.4) 15(1.5,0.8)
  oval 0.2x0.8 smd mask+0.05: 6(-0.8,-1.5) 7(-0.4,-1.5) 8(0,-1.5) 9(0.4,-1.5) 10(0.8,-1.5) 16(0.8,1.5) 17(0.4,1.5) 18(0,1.5) 19(-0.4,1.5) 20(-0.8,1.5)
  rect 1.8x1.8 smd paste-2539.97 mask+0.05: 21(0,0)
  body extent -1.5,-1.5 1.5,1.5, height 0.9
X1-DFN1006-3 [mm]
  oval 0.508x0.229 on Bottom Paste: 0(-0.4,-0.25) 0(-0.4,0.25)
  rect 0.4x0.25 smd paste-1: 1(-0.35,0.225) 2(-0.35,-0.225)
  rect 0.4x0.7 smd: 3(0.35,0)
  silkscreen extent -0.85,0.25 -0.85,0.25, body extent -0.5,-0.3 0.5,0.3, height 0.4

## Part data
C100 C200 C201: library part CAP1033, Manufacturer 1=KEMET, Manufacturer 2="Samsung Electro-Mechanics", Manufacturer 3="Würth Elektronik", Manufacturer 6=Yageo, Manufacturer Part Number 1=C0402C104K4RAC7867, Manufacturer Part Number 2=CL05B104KO5NNNC, Manufacturer Part Number 3=885012205037, Manufacturer Part Number 4=CL05B104KO5NNND, Manufacturer Part Number 5=CL05B104KO5NNNO, Manufacturer Part Number 6=CC0402KRX7R7BB104, Operating Temperature="-55C to +125C", Package=0402, Supplier Part Number 1=399-C0402C104K4RAC7867TR-ND, Temperature Coefficient=X7R, Tolerance=10%, Voltage=16V, Category=Capacitor, Description_="CAP CER 0.1uF 16V 10% X7R SMD 0402", Manufacturer 4="Samsung Electro-Mechanics", Manufacturer 5="Samsung Electro-Mechanics", MCHP-ID=CAP1033, Populated=Yes, Revision=11, Supplier 1=Digi-Key, Supplier 2=Digi-Key, Supplier 3=Digi-Key, Supplier 4=Mouser, Supplier 5="Samsung Electro-Mechanics", Supplier 6=Yageo, Supplier Part Number 2=1276-1001-1-ND, Supplier Part Number 3=732-7532-1-ND, Supplier Part Number 4=187-CL05B104KO5NNND, Supplier Part Number 5=CL05B104KO5NNNO, Supplier Part Number 6=CC0402KRX7R7BB104, Symbol="Capacitor NP", Type=Ceramic
C101 C102: library part CAP2439, Manufacturer 1="Samsung Electro-Mechanics", Manufacturer Part Number 1=CL05B102KA5NNWC, Operating Temperature="-55C to +125C", Package=0402, Supplier Part Number 1=1276-1490-1-ND, Temperature Coefficient=X7R, Tolerance=10%, Voltage=25V, Category=Capacitor, Description_="Ceramic capacitor, SMD 0402, X7R, 25V, +/-10%, 1000pF", MCHP-ID=CAP2439, Populated=YES, Revision=2, Supplier 1=Digi-Key, Symbol="Capacitor NP", Type=Ceramic
C103: library part CAP2597, Manufacturer 1="Samsung Electro-Mechanics", Manufacturer 2=Murata, Manufacturer Part Number 1=CL05B103KB5NNNC, Manufacturer Part Number 2=GRM155R71H103KA88D, Operating Temperature="-55°C - 125°C", Package=0402, Supplier Part Number 1=1276-1028-1-ND, Temperature Coefficient=X7R, Tolerance=10%, Voltage=50V, Category=Capacitor, Description_="CAP CER 10nF 10% 50V X7R 0402", MCHP-ID=CAP2597, Populated=YES, Revision=1, Supplier 1=Digi-Key, Supplier 2=Digi-Key, Supplier Part Number 2=490-4516-2-ND, Symbol="Capacitor NP", Type=Ceramic
C202 C203: library part CAP1288, Manufacturer 1="TDK Corporation", Manufacturer Part Number 1=C1608X5R1C475K080AC, Operating Temperature="-55C to +85C", Package=0603, Supplier Part Number 1=445-7478-1-ND, Temperature Coefficient=X5R, Tolerance=10%, Voltage=16V, Category=Capacitor, Description_="CAP CER 4.7uF 16V 10% X5R SMD 0603", MCHP-ID=CAP1288, Populated=YES, Revision=1, Supplier 1=Digi-Key, Symbol="Capacitor NP", Type=Ceramic
C204: library part CAP1765, Manufacturer 1=Murata, Manufacturer 2="TDK Corporation", Manufacturer Part Number 1=GRM155R61C225KE44D, Manufacturer Part Number 2=C1005X5R1C225K050BC, Operating Temperature="-55°C ~ 85°C", Package=0402, Supplier Part Number 1=490-10455-2-ND, Temperature Coefficient=X5R, Tolerance=10%, Voltage=16V, Category=Capacitor, Description_="CAP CER 2.2uF 16V 10% X5R SMD 0402", MCHP-ID=CAP1765, Populated=YES, Revision=2, Supplier 1=Digi-Key, Supplier 2=Digi-Key, Supplier Part Number 2=445-9085-1-ND, Symbol="Capacitor NP", Type=Ceramic
C205: library part CAP1265, Manufacturer 1=KEMET, Manufacturer Part Number 1=C0402C222J3GACTU, Operating Temperature="-55C to +125C", Package=0402, Supplier Part Number 1=399-8957-1-ND, Temperature Coefficient=C0G, Tolerance=5%, Voltage=25V, Category=Capacitor, Description_="CAP CER 2200pF 25V 5% C0G SMD 0402", MCHP-ID=CAP1265, Populated=YES, Revision=1, Supplier 1=Digi-Key, Symbol="Capacitor NP", Type=Ceramic
D100 D101: library part DIODE1857, "LED", Forward Current=20mA, Manufacturer 1=Kingbright, Manufacturer Part Number 1=APTL3216SYCK-01, Operating Temperature="-55°C to +85°C", Package=1206, Power=75mW, Supplier Part Number 1=754-APTL3216SYCK01CT-ND, Category=Diode, Description_="DIO LED YELLOW 2V 20mA 350mcd Clear SMD RM 1206", MCHP-ID=DIODE1857, Populated=YES, Revision=1, Supplier 1=Digi-Key, Symbol=LED_yellow, Type="LED Single"
D200 D201: library part DIODE1945, "LED", Forward Current=25mA, Manufacturer 1=Luckylight, Manufacturer Part Number 1=S192GC-1BG, Operating Temperature="-40C to +80C", Package=0603, Power=60mW, Reverse Current=10uA, Reverse Voltage=5V, Category=Diode, Description_="DIO LED GREEN 2V 25mA 40mcd CLEAR SMD 0603", MCHP-ID=DIODE1945, Populated=YES, Revision=1, Supplier 1="Cabcon A/S", Supplier Part Number 1=S192GC-1BG, Symbol=LED_green, Type="LED Single"
J100: library part CON3021, Current=3A, Manufacturer 1=WCON, Manufacturer Part Number 1=2185-107RSNCYNR1, Operating Temperature="-40°C to +105°C", Voltage=1kV, Assembly Type="TH PIP", Category=Connector, Description_="CON HDR-2.54 FEMALE 1x7 TIN 5.00MH TH-PIP R/A", MCHP-ID=CON3021, Populated=YES, Revision=1, Supplier 1="Cabcon A/S", Supplier Part Number 1=2185-107RSNCYNR1, Symbol="Header 1x7", Type="Header 2.54mm"
J101: library part CON3018, Current=3A, Manufacturer 1=WCON, Manufacturer Part Number 1=1125-1102S0R140CR01, Operating Temperature="-40°C to +105°C", Voltage=1kV, Assembly Type="TH PIP", Category=Connector, Description_="CON HDR-2.54 MALE 1x2 GOLD FLASH/TIN 6.00MH TH-PIP R/A", MCHP-ID=CON3018, Populated=YES, Revision=1, Supplier 1="Cabcon A/S", Supplier Part Number 1=1125-1102S0R140CR01, Symbol="Header 1x2", Type="Header 2.54mm"
J102 J103: library part CON3020, Current=3A, Manufacturer 1=WCON, Manufacturer Part Number 1=2185-102RSNCYNR1, Operating Temperature="-40°C to +105°C", Voltage=1kV, Assembly Type="TH PIP", Category=Connector, Description_="CON HDR-2.54 FEMALE 1x2 TIN 5.00MH TH-PIP R/A", MCHP-ID=CON3020, Populated=YES, Revision=1, Supplier 1="Cabcon A/S", Supplier Part Number 1=2185-102RSNCYNR1, Symbol="Header 1x2", Type="Header 2.54mm"
J104: library part CON2116, Assembly Type=Mechanical, Category=Connector, Description_="CON JUMPER 0402 CLOSED PCB TRACE LINK MANUAL CUT", MCHP-ID=CON2116, Populated=DNP, Revision=1, Symbol="CON JMPR LINK CLOSED"
J105: library part CON2772, Assembly Type=Mechanical, Category=Connector, Description_="CON JUMPER 0603 CLOSED PCB TRACE LINK MANUAL CUT", MCHP-ID=CON2772, Populated=DNP, Revision=1, Symbol="CON JMPR LINK CLOSED"
J200: library part CON2580, Current=5A, Manufacturer 1="KLS Electronic", Manufacturer Part Number 1=L-KLS1-5409-R, Operating Temperature="-30C to +85C", Voltage="100V AC", Assembly Type=SMD, Category=Connector, Description_="CON USB2.0 Type-C Female SMD R/A", MCHP-ID=CON2580, Populated=YES, Revision=2, Supplier 1="Cabcon A/S", Supplier Part Number 1=L-KLS1-5409-R, Symbol="CON USB2.0-C RCPT SMD RA KLS KLS1-5409", Type=USB
J201: library part CON3019, Current=3A, Manufacturer 1=WCON, Manufacturer Part Number 1=1125-1103S0R140CR01, Operating Temperature="-40°C to +105°C", Voltage=1kV, Assembly Type="TH PIP", Category=Connector, Description_="CON HDR-2.54 MALE 1x3 GOLD FLASH/TIN 6.00MH TH-PIP R/A", MCHP-ID=CON3019, Populated=YES, Revision=1, Supplier 1="Cabcon A/S", Supplier Part Number 1=1125-1103S0R140CR01, Symbol="Header 1x3", Type="Header 2.54mm"
JP100 JP200: library part MECH0482, Manufacturer 1=WCON, Manufacturer Part Number 1=3710-6001OS0B01, Operating Temperature="-40C to +105C", Category=Hardware, Description_="MECH HW JUMPER 2.54mm 1x2 Black", MCHP-ID=MECH0482, Populated=MECH, Revision=2, Supplier 1="Cabcon A/S", Supplier Part Number 1=3710-6001OS0B01, Symbol="Jumper Mechanical", Type=Jumper
LABEL1: Manufacturer 1="ACT Logimark AS", Manufacturer 2="Sunrise Paper (M) Sdn Bhd", Manufacturer 3=Raynen, Manufacturer Part Number 1=505462, Manufacturer Part Number 2=037268-5, Manufacturer Part Number 3=10010407, Category=MCHP-Manufacturing, Description_="LABEL PCBA 18x6mm Datamatrix Assy# / Rev / Serial / Date", MCHP-ID=08-10015, Populated=MECH, Revision=4, Supplier 1="ACT Logimark AS", Supplier 2="Microchip Technology", Supplier 3=Raynen, Supplier Part Number 1=505462, Supplier Part Number 2=01000-004967, Supplier Part Number 3=10010407, Symbol=08-10015, Type="PCBA Label"
Q100 Q101: library part TRA1340, "Transistor MOS", Current=260mA, Drain to Source Voltage=60V, Manufacturer 1="Diodes Incorporated", Manufacturer Part Number 1=DMN65D8LFB-7, Manufacturer Part Number 2=DMN65D8LFB-7B, Package=X1-DFN1006-3, Power=430mW, Supplier Part Number 1=DMN65D8LFB-7DITR-ND, Category=Transistor, Description_="TRANS FET N-CH DMN65D8LFB-7B 260mA 60V 430mW X1_DFN1006-3", Manufacturer 2="Diodes Incorporated", MCHP-ID=TRA1340, Populated=YES, Revision=3, Supplier 1=Digi-Key, Supplier 2=Digi-Key, Supplier Part Number 2=DMN65D8LFB-7BDICT-ND, Symbol="Transistor MOS-N GSD", Type=FET, Voltage=60V
Q200: library part TRA1611, "Transistor MOS", Current=-3.6A, Drain to Source Voltage=-20V, Manufacturer 1="Texas Instruments", Manufacturer Part Number 1=CSD25501F3, Manufacturer Part Number 2=CSD25501F3T, Operating Temperature="-55C to +150C", Package=LGA, Supplier Part Number 1=296-51017-2-ND, Category=Transistor, Description_="TRANS FET P-CH CSD25501F3 -20V -3.6A 0.076R LGA", Gate to Source Voltage=-20V, Manufacturer 2="Texas Instruments", MCHP-ID=TRA1611, Populated=YES, Revision=1, Supplier 1=Digi-Key, Supplier 2=Digi-Key, Supplier Part Number 2=296-47556-2-ND, Symbol="Transistor MOS-P GSD", Type=FET, Voltage=-20V
R100 R101: library part RES1023, Manufacturer 1=Panasonic, Manufacturer Part Number 1=ERJ-2RKF2201X, Operating Temperature="-55C to +155C", Package=0402, Power=1/10W, Supplier Part Number 1=P2.20KLTR-ND, Temperature Coefficient=100ppm/C, Tolerance=1%, Voltage=50V, Category=Resistor, Composition=TKF, Description_="RES TKF 2.2k 1% 1/10W SMD 0402", MCHP-ID=RES1023, Populated=YES, Revision=1, Supplier 1=Digi-Key, Symbol=Resistor, Type="RES SMD"
R102 R110 R205: library part RSMT1163, Manufacturer 1=Yageo, Manufacturer Part Number 1=RC0402FR-07470RL, Package=0402, Supplier Part Number 1=311-470LRCT-ND, Tolerance=1%, Category=Resistor, Description_="RES TKF 470R 1% 1/16W MF 0402", MCHP-ID=RSMT1163, Populated=YES, Revision=2, Supplier 1=Digi-Key, Symbol=resistor, Type="RES SMD"
R103 R104 R117 R119: library part RES1010, Manufacturer 1=Panasonic, Manufacturer Part Number 1=ERJ-2RKF3003X, Operating Temperature="-55C to +125C", Package=0402, Power=1/10W, Supplier Part Number 1=P300KLTR-ND, Temperature Coefficient=100ppm/C, Tolerance=1%, Voltage=50V, Category=Resistor, Composition=TKF, Description_="RES TKF 300k 1% 1/10W SMD 0402", MCHP-ID=RES1010, Populated=YES, Revision=1, Supplier 1=Digi-Key, Symbol=Resistor, Type="RES SMD"
R105 R106 R107 R109 R114 R116 R122 R126 R127 R128 R129 R200 R201 R204: library part RES1022, Manufacturer 1=Panasonic, Manufacturer Part Number 1=ERJ-2RKF1001X, Operating Temperature="-55C to +155C", Package=0402, Power=1/10W, Supplier Part Number 1=P1.00KLTR-ND, Temperature Coefficient=100ppm/C, Tolerance=1%, Voltage=50V, Category=Resistor, Composition=TKF, Description_="RES TKF 1k 1% 1/10W SMD 0402", MCHP-ID=RES1022, Populated=YES, Revision=3, Supplier 1=Digi-Key, Symbol=Resistor, Type="RES SMD"
R108: library part RPOT1027, Manufacturer 1="KLS Electronic", Manufacturer Part Number 1=L-KLS4-PT10-M-V60-104-A-2020-T, Manufacturer Part Number 2=L-KLS4-PT10-M-V60-104-A-2020, Package=V60, Power=0.15W, Tolerance=20%, Voltage=100V, Category=Resistor, Composition=CC, Description_="RES TRIMMER Carbon 100k 20% 0.15W SMD V60", Manufacturer 2="KLS Electronic", MCHP-ID=RPOT1027, Populated=YES, Revision=2, Supplier 1="Cabcon A/S", Supplier 2="Cabcon A/S", Supplier Part Number 1=L-KLS4-PT10-M-V60-104-A-2020-T, Supplier Part Number 2=L-KLS4-PT10-M-V60-104-A-2020, Symbol="Resistor Var", Type=Trimmer
R111 R112 R113: library part RSMT0156, Manufacturer 1=Panasonic, Manufacturer 2="Stackpole Electronics Inc", Manufacturer 3=Vishay, Manufacturer Part Number 1=ERJ-6ENF1002V, Manufacturer Part Number 2=RMCF0805FT10K0, Manufacturer Part Number 3=CRCW080510K0FKEA, Operating Temperature="-55C to +155C", Package=0805, Power=1/8W, Supplier Part Number 1=P10.0KCTR-ND, Temperature Coefficient=100ppm/C, Tolerance=1%, Voltage=150V, Category=Resistor, Composition=TKF, Description_="RES TKF 10k 1% 1/8W SMD 0805", MCHP-ID=RSMT0156, Populated=Yes, Revision=3, Supplier 1=Digi-Key, Supplier 2=Digi-Key, Supplier 3=Digi-Key, Supplier Part Number 2=RMCF0805FT10K0TR-ND, Supplier Part Number 3=541-10.0KCTR-ND, Symbol=Resistor, Type="RES SMD"
R115 R121 R123: library part RES1457, Manufacturer 1="KOA Speer", Manufacturer Part Number 1=RK73H1ETTP1003F, Operating Temperature="-55C to +155C", Package=0402, Power=1/16W, Supplier Part Number 1=660-RK73H1ETTP1003F, Temperature Coefficient=100ppm/C, Tolerance=1%, Category=Resistor, Circuit Type=Isolated, Composition=TF, Description_="RES TKF 100k 1% 1/16W SMD 0402", MCHP-ID=RES1457, Populated=YES, Revision=1, Supplier 1=Mouser, Symbol=Resistor, Type="RES SMD"
R118 R120: library part RSMT0001, Manufacturer 1=Panasonic, Manufacturer 2="Stackpole Electronics Inc", Manufacturer 3=Vishay, Manufacturer 4=Yageo, Manufacturer 5="KOA Speer", Manufacturer Part Number 1=ERJ-3GEY0R00V, Manufacturer Part Number 2=RMCF0603ZT0R00, Manufacturer Part Number 3=CRCW06030000Z0EA, Manufacturer Part Number 4=RC0603JR-070RL, Manufacturer Part Number 5=RK73Z1JTTP, Operating Temperature="-55C to +155C", Package=0603, Power=1/10W, Supplier Part Number 1=P0.0GTR-ND, Category=Resistor, Composition=TKF, Description_="RES TKF 0R 1/10W SMD 0603", MCHP-ID=RSMT0001, Populated=Yes, Revision=7, Supplier 1=Digi-Key, Supplier 2=Digi-Key, Supplier 3=Digi-Key, Supplier 4=Digi-Key, Supplier 5=Digi-Key, Supplier 6=Mouser, Supplier Part Number 2=RMCF0603ZT0R00TR-ND, Supplier Part Number 3=RMCF0603ZT0R00CT-ND, Supplier Part Number 4=541-0.0GCT-ND, Supplier Part Number 5=311-0.0GRCT-ND, Supplier Part Number 6=660-RK73Z1JTTP, Symbol=Resistor, Type="RES SMD"
R124 R206 R207 R208: library part RES2662, Manufacturer 1=Yageo, Manufacturer Part Number 1=RC0402FR-0747KL, Package=0402, Supplier Part Number 1=311-47.0KLRCT-ND, Tolerance=1%, Voltage=50V, Category=Resistor, Composition=TKF, Description_="RES TKF 47k 1% 1/16W SMD 0402", MCHP-ID=RES2662, Populated=YES, Revision=3, Supplier 1=Digi-Key, Symbol=Resistor, Type="RES SMD"
R125: library part RES2543, Manufacturer 1="TE Connectivity", Manufacturer Part Number 1=CRG0402F10K, Operating Temperature="-55C to 155C", Package=0402, Power=1/16W, Supplier Part Number 1=A121528CT-ND, Temperature Coefficient=100ppm/C, Tolerance=1%, Voltage=50V, Category=Resistor, Composition=TKF, Description_="RES TKF 10k 1% 1/16W SMD 0402", MCHP-ID=RES2543, Populated=YES, Revision=3, Supplier 1=Digi-Key, Symbol=Resistor, Type="RES SMD"
R202 R203: library part RES1655, Manufacturer 1="Panasonic Electronic Components", Manufacturer Part Number 1=ERJ-2RKF5101X, Operating Temperature="-55C to +155C", Package=0402, Power=1/10W, Supplier Part Number 1=P5.10KLCT-ND, Temperature Coefficient=100ppm/C, Tolerance=1%, Category=Resistor, Composition=TKF, Description_="RES TKF 5.1k 1% 1/10W SMD 0402", MCHP-ID=RES1655, Populated=YES, Revision=1, Supplier 1=Digi-Key, Symbol=Resistor, Type="RES SMD"
SHAFT100: library part MECH0618, Manufacturer 1=Piher, Manufacturer Part Number 1=JPEPL5012NEI, Operating Temperature="-40C to +90C", Supplier Part Number 1=1993-JPEPL5012NEI-ND, Category=Hardware, Description_="MECH HW MISC PT10-SHAFT", MCHP-ID=MECH0618, Populated=MECH, Revision=1, Supplier 1=Digi-Key, Symbol=PT10_SHAFT, Type=Misc
SW100: library part SWITCH1172, "Switch", Current=50mA, Manufacturer 1="Dailywell Electronics Co.,Ltd.", Manufacturer Part Number 1=TS604VM1-035CR-R, Operating Temperature="-40C to +85C", Voltage=12V, Category=Switch, Description_="SWITCH TACT SPST 12 50mA TS604VM1-035CR-R SMD", MCHP-ID=SWITCH1172, Populated=YES, Revision=2, Supplier 1="Cabcon A/S", Supplier Part Number 1=TS604VM1-035CR-R, Symbol="Switch 4 Pin", Type=Tactile
SW101 SW102 SW103 SW105 SW200: library part SWITCH1238, Current=100mA, Manufacturer 1="Same Sky", Manufacturer Part Number 1=SLW-88229-2-SMT-TR, Operating Temperature="-20C to +70C", Supplier Part Number 1=2223-SLW-88229-2-SMT-TR-ND, Voltage=12V, Category=Switch, Description_="SWITCH SLIDE SPDT 12V 100mA SLW-88229-2-SMT-TR SMD", MCHP-ID=SWITCH1238, Populated=YES, Revision=1, Supplier 1=Digi-Key, Symbol="SWITCH SLIDE SMD SPDT SLW-88229-2-SMT-TR", Type=Slide
SW104: library part SWITCH1240, Current=50mA, Manufacturer 1="KLS Electronic", Manufacturer Part Number 1=L-KLS7-MSS-1400SD-BR, Operating Temperature="-25C to 70C", Voltage=12V, Category=Switch, Description_="SWITCH SLIDE SP4T 12V 50mA L-KLS7-MSS-1400SD-BR SMD", MCHP-ID=SWITCH1240, Populated=YES, Revision=1, Supplier 1="Cabcon A/S", Supplier Part Number 1=L-KLS7-MSS-1400SD-BR, Symbol="SWITCH SLIDE SMD SP4T", Type=Slide
TP200 TP201 TP202 TP203 TP204: library part CON2120, "Test Point", Assembly Type=SMD, Category=Connector, Description_="CON TP PAD PCB SMD D0.8", MCHP-ID=CON2120, Populated=DNP, Revision=1, Symbol="Test Point No BOM", Type="Test Point No BOM"
U100: library part IC2705, Manufacturer 1="Microchip Technology", Manufacturer Part Number 1=MTCH9010T-I/REB, Manufacturer Part Number 2=MTCH9010-I/REB, Operating Temperature="-40C to 85C", Category=MCHP-Interface, Description_="MCHP INTERFACE TOUCH CONTROLLER UART/I2C MTCH9010-I/REB VQFN-20", Manufacturer 2="Microchip Technology", MCHP-ID=IC2705, Populated=YES, Revision=1, Supplier 1="Microchip Technology", Supplier 2="Microchip Technology", Supplier Part Number 1=MTCH9010T-I/REB, Supplier Part Number 2=MTCH9010-I/REB, Symbol=MTCH9010-VQFN20, Type="Touch Controller"
U200 U202: library part IC2714, Manufacturer 1="Diodes Incorporated", Manufacturer Part Number 1=74LVC1T45DW-7, Operating Temperature="-40C to +125C", Package=SOT-363, Supplier Part Number 1=31-74LVC1T45DW-7TR-ND, Category=IC, Description_="IC TRANSCEIVER 74LVC1T45DW-7 Single Bit Bidirectional Voltage Translator SOT-363", MCHP-ID=IC2714, Populated=YES, Revision=1, Supplier 1=Digi-Key, Symbol="74LVC(H)1T45 SOT-23-6_SC-70-6_SOT-6_SOT-363_DSBGA", Type=Transceiver
U201: library part MIC6971, Manufacturer 1="Microchip Technology", Manufacturer Part Number 1=MCP2221A-I/ML, Manufacturer Part Number 2=MCP2221AT-I/ML, Operating Temperature="-40C to +85C", Supplier Part Number 1=MCP2221A-I/ML-ND, Category=MCHP-Interface, Description_="MCHP INTERFACE USB I2C/UART MCP2221A-I/ML QFN-16", Manufacturer 2="Microchip Technology", MCHP-ID=MIC6971, Populated=YES, Revision=3, Supplier 1=Digi-Key, Supplier 2="Microchip Technology", Supplier Part Number 2=MCP2221AT-I/ML, Symbol="MCP2221 QFN-16", Type=USB
U203: library part MIC9604, Manufacturer 1="Microchip Technology", Manufacturer Part Number 1=MIC2008YML-TR, Operating Temperature="-40C to +85C", Supplier Part Number 1=576-2591-2-ND, Category=MCHP-Analog, Description_="MCHP ANALOG POWER SWITCH 5.5V 2.1A MIC2008YML-TR VDFN-6", MCHP-ID=MIC9604, Populated=YES, Revision=1, Supplier 1=Digi-Key, Supplier 2="Microchip Technology", Supplier Part Number 2=MIC2008YML-TR, Symbol="MIC2008YML-TR VDFN-6", Type="Power Switch"
U204: library part MIC7482, Manufacturer 1="Microchip Technology", Manufacturer Part Number 1=MCP1754T-3302E/MC, Manufacturer Part Number 2=MCP1754-3302E/MC, Operating Temperature="-40C to +125C", Supplier Part Number 1=MCP1754T-3302E/MC-ND, Category=MCHP-Analog, Description_="MCHP ANALOG LDO 3.3V MCP1754T-3302E/MC DFN-8", Manufacturer 2="Microchip Technology", MCHP-ID=MIC7482, Populated=YES, Revision=3, Supplier 1=Digi-Key, Supplier 2="Microchip Technology", Supplier Part Number 2=MCP1754-3302E/MC, Symbol="MCP1755 DFN-8", Type=LDO
U205: library part MIC8744, Manufacturer 1="Microchip Technology", Manufacturer Part Number 1=MIC94163YCS-TR, Operating Temperature="-40C to +125C", Supplier Part Number 1=576-4454-2-ND, Category=MCHP-Analog, Description_="IC LOAD SWITCH HI SIDE 3A 6WLCSP", MCHP-ID=MIC8744, Populated=YES, Revision=1, Supplier 1=Digi-Key, Symbol=MIC94163_1.5MM_1MM, Type="Power Switch"

## Free pads (board coordinates)
  round 0.8 smd far side paste-1: 5(0.655,13.2) 5(13.34,6.904) 5(13.837,58.362) 5(13.837,61.952) 5(18.28,9.87) 5(18.28,11.513) 5(25.004,3.425) 5(25.274,58.362) 5(25.274,61.952) 5(26.584,5.7) 5(31.796,29.883) 5(36.712,58.362) 5(36.712,61.952) 5(39.76,33.667) 5(42.252,11.134) 5(48.15,58.362) 5(48.15,61.952) 5(50.71,32.955) 5(52.324,51.688) 5(52.348,56.819)
  round 6.4 hole 3.2: 666(3.5,66.5) 666(3.5,3.5) 666(56.5,3.5) 666(56.5,66.5)

## Via types
v1: diameter 0.55, hole 0.25, Top Layer to Bottom Layer, 159 vias
v2: diameter 0.55/0.8 (per signal layer), hole 0.25, Top Layer to Bottom Layer, 13 vias
v3: diameter 0.5, hole 0.2, Top Layer to Bottom Layer, 10 vias

## Nets (pads, with @x,y where several pads share a name; then routed paths per layer and width w, separated by ;. In a path a pad name is that pad's centre, name@x,y a point inside that pad or via, vN(x,y) a via of type N, cw(c..) or ccw(c..) an arc to the next point about the centre after c; other vN are vias at no path point)
\ECFG_ENABLE: pad.5@36.712,58.362 R114.1 U100.5 | length 42
  Top Layer w0.15: U100.5@46.55,30.8 46.55,31.294 48.007,32.751 48.007,33.824 v1(48.009,33.826)
  Bottom Layer w0.15: pad.5@36.712,58.362 36.72,58.354 36.836,58.238 41.256,58.238 54.388,45.105 54.388,40.205 v1(48.009,33.826) ; pad.5@36.727,58.362 R114.1@36.727,59.679
\OUTPUT_ENABLE: pad.5@13.837,58.362 R122.1 U100.15 | length 47.5
  Top Layer w0.15: v1(42.375,29.4) 42.463,29.4 42.663,29.2 U100.15@43.55,29.2
  Bottom Layer w0.15: R122.1@13.852,59.516 13.837,59.5 13.837,58.196 19.425,58.196 43.656,33.965 43.656,30.681 v1(42.375,29.4)
\RESET: R102.1 U100.1 | length 2.8
  Top Layer w0.15: U100.1@46.55,29.2 46.859,29.2 47.155,28.904 v2(47.155,28.8)
  Bottom Layer w0.15: R102.1@47.106,26.855 47.155,26.904 v2(47.155,28.8)
\SYSTEM_LOCK: pad.5@25.274,58.362 R116.1 U100.6 | length 52.5
  Top Layer w0.15: U100.6@45.85,31.5 45.85,31.814 45.875,31.839 45.875,31.841 47.509,33.475 47.509,34.599 v1(47.545,34.634)
  Bottom Layer w0.15: R116.1@25.29,59.679 25.29,58.362 pad.5@25.274,58.362 25.274,58.226 26,57.5 41.569,57.5 47.55,51.519 53.934,45.135 53.934,41.024 v1(47.545,34.634)
BRIDGE_RX: pad.5@18.28,11.513 U200.3 U201.4 | length 8.1
  Bottom Layer w0.15: U201.4@13.225,10.795 13.245,10.775 17.542,10.775 pad.5@18.28,11.513 19.692,12.925 U200.3@20.25,12.925 ; U200.3@20.25,12.934 U200.3@20.452,12.934
BRIDGE_TX: pad.5@18.28,9.87 U201.5 U202.3 | length 8
  Bottom Layer w0.15: U201.5@12.275,9.845 12.319,9.801 18.21,9.801 pad.5@18.28,9.87 ; pad.5@18.28,9.845 20.225,9.845 U202.3@20.25,9.87
CAP_INPUT: J103.2 R113.2 | length 10.4
  Top Layer w0.15: R113.2@45.45,35.4 45.45,39.27 J103.2@50.055,43.875
DETECT: Q100.1 R103.2 R127.2 U100.12 | length 64
  Top Layer w0.15: v1(37,34.25) 37,43.168 v2(50.591,56.759) ; v1(41.75,30.729) 42.079,30.4 U100.12@43.55,30.4
  Bottom Layer w0.15: R127.2@14.291,39.5 31.713,39.5 36.963,34.25 v1(37,34.25) 37,34.205 40.476,30.729 v1(41.75,30.729) ; v2@50.591,57 50.618,57.027 R103.2@50.618,58.917 Q100.1@51.521,58.917